# Altium PCB WIFISocket.PcbDoc
Units mm, origin at the board's own origin, x right, y up, seen from the top; angles counter-clockwise.
Board outline 40 x 64 mm, 2 copper layers (Top Layer, Bottom Layer); 30 components, 23 nets, 92 pads, 80 vias.
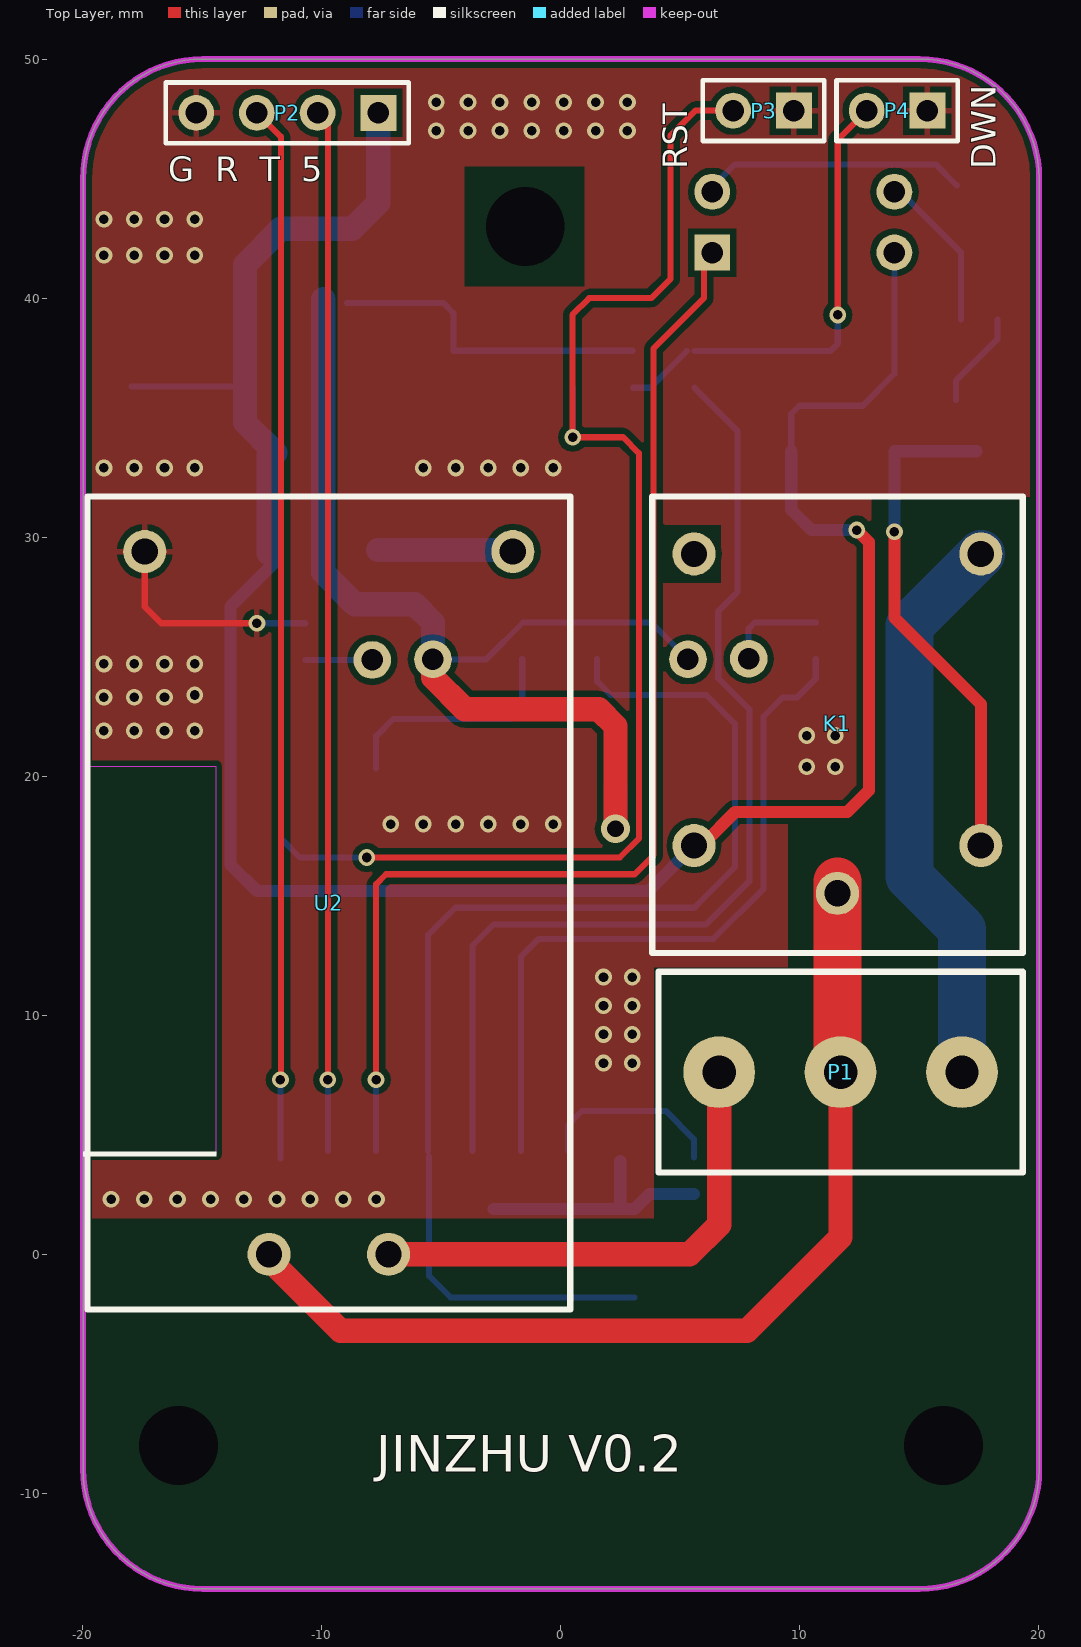
[diagram p0: Top Layer view]
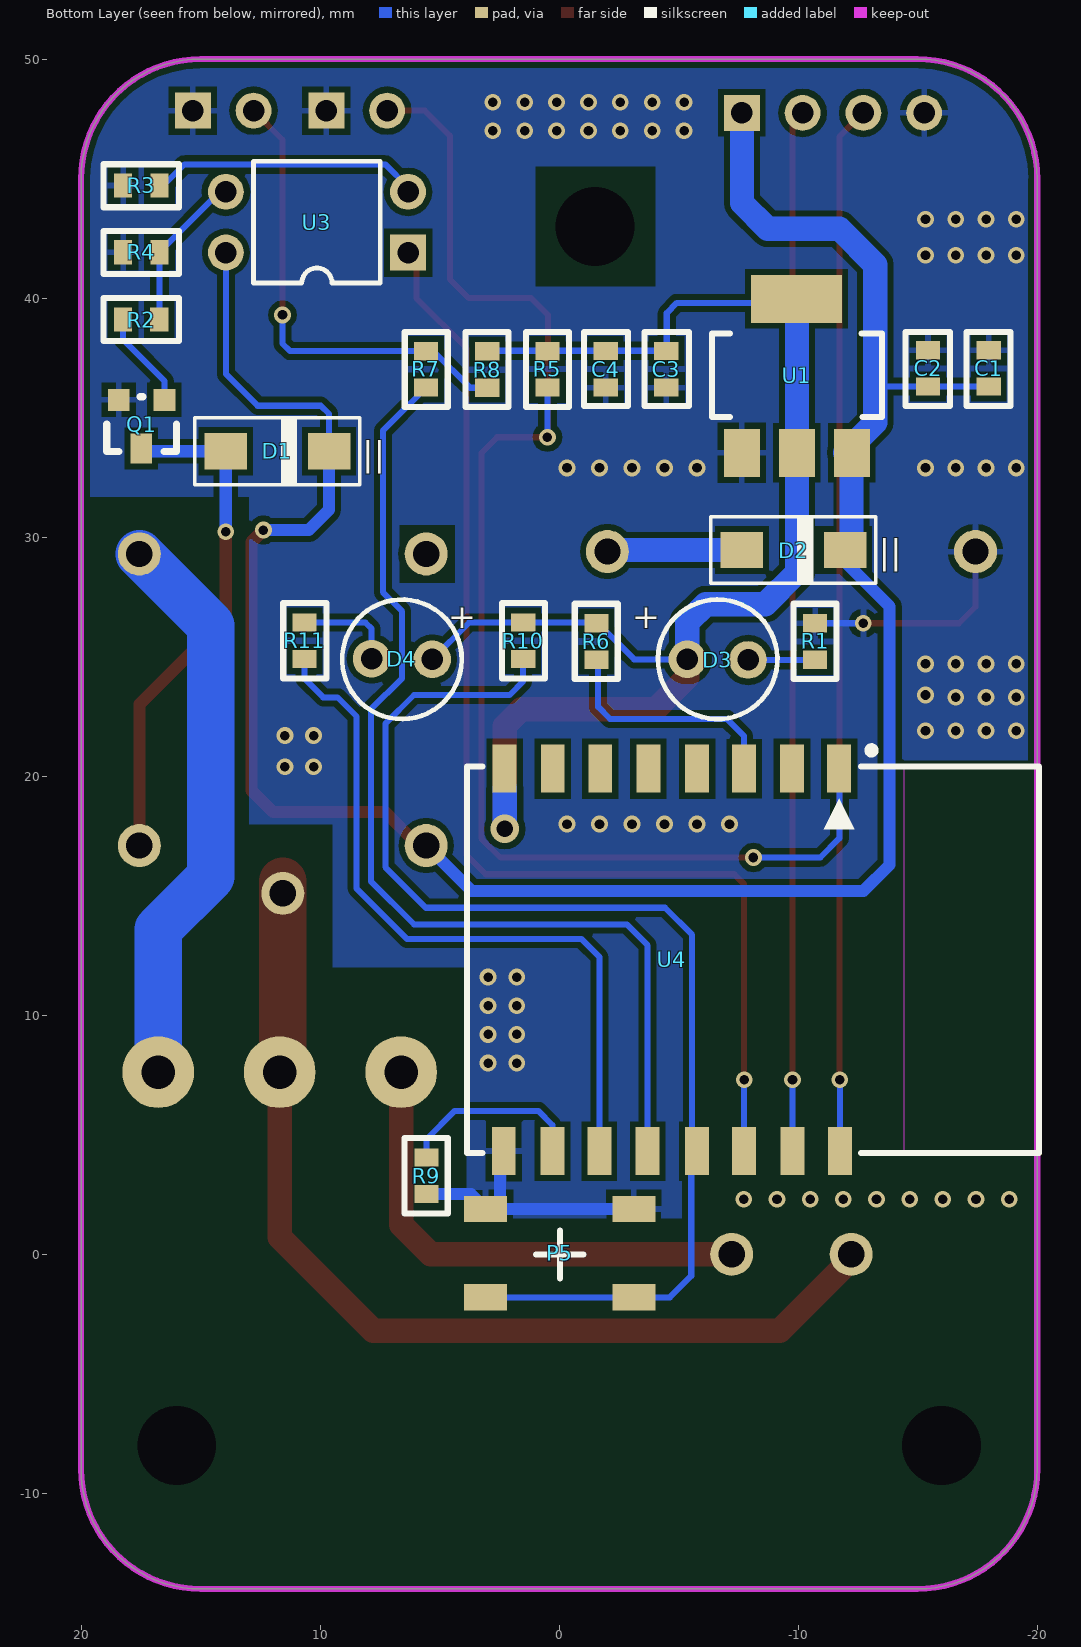
[diagram p1: Bottom Layer view, seen from below]

## Layer stack, top to bottom
Top Layer: signal copper 0.0356
Dielectric: dielectric 0.32, FR-4, Dk 4.8
Bottom Layer: signal copper 0.0356

## Board outline
-19.973,-8.998 -19.973,45.002 cw(c-14.973,45.002) -14.973,50.002 15.027,50.002 cw(c15.027,45.002) 20.027,45.002 20.027,-8.998 cw(c15.027,-8.998) 15.027,-13.998 -14.973,-13.998 cw(c-14.973,-8.998)

## Design rules (kind name [scope] priority, off if disabled: settings)
Clearance [All] p1: gap=0.254
HoleSize [All] p1: absolutevalues=TRUE maxlimit=5 minlimit=0.025 maxpercent=80.000 minpercent=20.000
PolygonConnect [All] p1: connectstyle=Relief reliefconductorwidth=0.254 reliefentries=4 polygonreliefangle="90 Angle"
RoutingVias [All] p1: holewidth=0.711 width=1.27 viastyle="Through Hole" minholewidth=0.711 minwidth=1.27 maxholewidth=0.711 maxwidth=1.27
SilkscreenOverComponentPads [All] p1: minsilkscreentomaskgap=0.254
SolderMaskExpansion [All] p1: expansion=0.102
TestPointUsage [All] p1: valid=0 allowmultiple=FALSE
Testpoint [All] p1: side=15 testpointundercomponent=TRUE minsize=1.016 maxsize=2.54 preferedsize=1.524 minholesize=0 maxholesize=1.016 preferedholesize=0.813 testpointgrid=0.025 style=1023 order=0123456789
Width 220VWidth [(InNet('ACL') OR InNet('ACN') OR InNet('SWL'))] p1: maxlimit=3 minlimit=1 preferedwidth=2
Width VCCWidth [(InNet('+5V') AND InNet('GND') AND InNet('VCC_3.3V'))] p2: maxlimit=1.016 minlimit=0.254 preferedwidth=0.508
Width [All] p3: maxlimit=2 minlimit=0.254 preferedwidth=0.254
22 further rules are at their usual default settings.

## Components (designator, comment, footprint, x,y, rotation, side; value= is the part's Value field where it differs from the comment)
C1 "0.1uF" 0603A -17.956,36.292 r90 bottom
C2 "10uF" 0603A -15.416,36.292 r90 bottom
C3 "10uF" 0603A -4.448,37.792 r270 bottom
C4 "0.1uF" 0603A -1.908,37.792 r270 bottom
D1 "IN4007" 1N4007 13.972,33.596 r180 bottom
D2 "IN4007" 1N4007 -7.62,29.464 r180 bottom
D3 "LED" LED -6.604,24.892 r0 bottom
D4 "LED" LED 6.604,24.892 r180 bottom
K1 "Relay" Relay 5.588,29.3 r180 top
P1 "Connector" KF128-3P 6.638,7.62 r0 top
P2 "UART" HDR1X4 -7.62,47.752 r180 top
P3 "RESET" HDR1X2 9.764,47.844 r180 top
P4 "DOWN" HDR1X2 15.352,47.844 r180 top
P5 "Button" BUTTON 0,0 r0 bottom
Q1 "S0805" SOT23 17.496,34.728 r0 bottom
R1 "Res" 0603R -10.668,26.416 r270 bottom
R2 "Res" 0603R 16.738,39.116 r0 bottom
R3 "Res" 0603R 18.288,44.704 r180 bottom
R4 "Res" 0603R 18.288,41.91 r180 bottom
R5 "Res" 0603R 0.508,36.242 r90 bottom
R6 "Res" 0603R -1.524,26.416 r270 bottom
R7 "Res" 0603R 5.588,36.242 r90 bottom
R8 "Res" 0603R 3.048,37.792 r270 bottom
R9 "Res" 0603R 5.588,4.064 r270 bottom
R10 "Res" 0603R 1.524,24.892 r90 bottom
R11 "Res" 0603R 10.668,24.892 r90 bottom
U1 "AMS1117-3.3" AMS1117-3.3 -7.62,33.528 r180 bottom
U2 "HLK-PM01" HLK_PM01 -12.192,0 r90 top
U3 "TLP521" DIP-4 10.16,43.18 r90 bottom
U4 "ESP12N" ESP_12 -11.684,20.32 r270 bottom

## Footprints (in the part's own frame and the unit in brackets; to place one, negate y for a bottom-side part, rotate by r counter-clockwise, add the part's x,y. Pads: shape width x height; smd on the part's side, far side on the other; paste and mask are expansions set on the pad)
1N4007 [mil]
  rect 70x60 smd: 1(0,0) 2(170,0)
  silkscreen extent -51,-55 220,55
0603A [mil]
  rect 30x40 smd: 1(0.31,0.44) 2(60.31,0.44)
  silkscreen extent -31,-35 91,37
0603R [mil]
  rect 30x40 smd: 1(0.66,0.41) 2(60.66,0.41)
  silkscreen extent -31,-35 93,35
AMS1117-3.3 [mil]
  rect 59x79 smd: 1(0,0) 2(90.55,0) 3(181.1,0)
  rect 150x79 smd: 2(89.88,253.54)
  silkscreen extent -49,59 231,197
BUTTON [mm] "[CHECK][9/6][PIN]"
  rect 1.8x1.1 smd: 1(-3.1,1.8) 1(3.1,1.8) 2(-3.1,-1.9) 2(3.1,-1.9)
  silkscreen extent -1,-1 1,1
DIP-4 [mm] "DIP; 4 Leads; Row Spacing 7.62 mm; Pitch 2.54 mm"
  rect 1.5x1.5 hole 0.9: 1(-1.27,-3.81)
  round 1.5 hole 0.9: 2(1.27,-3.81) 3(1.27,3.81) 4(-1.27,3.81)
  silkscreen extent -2.55,-2.65 2.55,2.65
ESP_12 [mm]
  rect 2x1 smd: 1(0,0) 2(0,-1.97) 3(0,-3.97) 4(0,-5.94) 5(0,-7.98) 6(0,-9.99) 7(0,-11.98) 8(0,-13.99) 9(16,-14.03) 10(16,-11.99) 11(16,-10.03) 12(16,-8.01) 13(16,-5.95) 14(16,-3.97) 15(16,-1.95) 16(16,0.03)
  silkscreen extent -0.91,-15.57 16.08,8.37
HDR1X2 [mm] "Connector; Header; 2 Position"
  rect 1.5x1.5 hole 0.9: 1(0,0)
  round 1.5 hole 0.9: 2(2.54,0)
  silkscreen extent -1.27,-1.27 3.81,1.27
HDR1X4 [mm] "Connector; Header; 4 Position"
  rect 1.5x1.5 hole 0.9: 1(0,0)
  round 1.5 hole 0.9: 2(2.54,0) 3(5.08,0) 4(7.62,0)
  silkscreen extent -1.27,-1.27 8.89,1.27
HLK_PM01 [mm] "[CHECK][9/5][SIZE][PIN]"
  round 1.8 hole 1.1: 1(0,0) 2(0,-5) 3(29.4,5.2) 4(29.4,-10.2)
  silkscreen extent -2.3,-12.6 31.7,7.6
KF128-3P [mm] "5.08mm"
  round 3 hole 1.4: 1(0,0) 2(5.08,0) 3(10.16,0)
  silkscreen extent -2.54,-4.2 12.7,4.2
LED [mil]
  round 62 hole 35.43: A(50,0) K(-50,1)
  silkscreen extent -98,-98 98,98
Relay [mm]
  round 1.8 hole 1.1: 1(-6,14.2) 2(0,0) 3(-12,0) 4(0,12.2) 5(-12,12.2)
  silkscreen extent -13.75,-2.4 1.75,16.7
SOT23 [mil]
  rect 36x36 smd: B(-37.5,-40) E(37.5,-40)
  rect 36x50 smd: C(0.5,40)
  silkscreen extent -57,-45 58,45

## Part data
C1 C4: library part CAP, "Capacitor"
C2 C3: library part CAPACITOR, "Capacitor"
D1 D2: "整流二极管"
K1: "SPDT Relay"
P1: library part Socket, "220V插座焊盘"
P2: "UART下载接口"
P3 P4: library part "Header 2", "Header, 2-Pin"
P5: "按键"
Q1: "NPN"
R1 R2 R3 R4 R5 R6 R7 R8 R9 R10 R11: "Resistor"
U1: "5Vת3V"
U2: "220V AC转5V DC模块"
U3: library part Optoisolator, "光耦"
U4: "ESP12N无线模块"

## Free pads (board coordinates)
  round 0 hole 3.3: 0(-1.473,43.002) 1(-15.973,-7.998) 2(16.027,-7.998)

## Via types
v1: diameter 0.7, hole 0.4, Top Layer to Bottom Layer, 79 vias
v2: diameter 1.2, hole 0.7, Top Layer to Bottom Layer, 1 vias

## Nets (pads, with @x,y where several pads share a name; then routed paths per layer and width w, separated by ;. In a path a pad name is that pad's centre, name@x,y a point inside that pad or via, vN(x,y) a via of type N, cw(c..) or ccw(c..) an arc to the next point about the centre after c; other vN are vias at no path point)
+5V: C1.1 C2.1 D1.2 D2.2 K1.4 P2.1 U1.3 U3.4 | length 97.8
  Top Layer w0.508: K1.4@6,17.2 7.3,18.5 12,18.5 12.9,19.4 12.9,29.8 v1(12.4,30.3)
  Bottom Layer w0.254: C1.1 C2.1 -13.2,36.3 ; D1.2 9.654,35.154 10,35.5 12.64,35.5 13.97,36.83 U3.4
  Bottom Layer w0.508: D2.2@-11.938,28.962 -13.8,27.1 -13.8,16.3 -12.7,15.2 3.688,15.2 K1.4 ; D1.2 9.654,31.146 10.5,30.3 v1(12.4,30.3)
  Bottom Layer w1.016: D2.2@-12.2,29.326 U1.3@-12.2,33.4 ; U1.3@-11.938,33.538 -13.2,34.8 -13.2,41.4 -11.7,42.9 -8.7,42.9 -7.62,43.98 P2.1
ACL: K1.1 P1.2 U2.1 | length 41.4
  Top Layer w1.016: U2.1 -12.192,-0.208 -9.2,-3.2 7.8,-3.2 11.718,0.718 P1.2
  Top Layer w2: P1.2@11.588,8.128 K1.1@11.588,15.6
ACN: P1.1 U2.2 | length 20.7
  Top Layer w1.016: U2.2 5.4,0 6.638,1.238 P1.1
GND: C1.2 C2.2 C3.2 C4.2 P2.4 P3.1 P4.1 P5.2 Q1.E R1.1 R3.1 R4.1 R9.2 U1.1 U2.3 U4.9 | length 19.8
  Top Layer w0.254: U2.3 -17.392,27.092 -16.7,26.4 v1(-12.7,26.4)
  Bottom Layer w0.254: v1(-12.7,26.4) R1.1
  Bottom Layer w0.508: P5.2@-2.8,1.9 3.1,1.9 3.723,2.523 R9.2 ; P5.2@2.5,2 U4.9@2.5,3.9
  other v1: -18.8,2.3 -17.412,2.3 -16.025,2.3 -14.637,2.3 -13.25,2.3 -11.862,2.3 -10.475,2.3 -9.087,2.3 -7.7,2.3 1.8,8 3,8 1.8,9.2 3,9.2 1.8,10.4 3,10.4 1.8,11.6 3,11.6 -7.1,18 -5.74,18 -4.38,18 -3.02,18 -1.66,18 -0.3,18 10.3,20.4 11.5,20.4 10.3,21.7 11.5,21.7 -19.1,21.9 -17.833,21.9 -16.567,21.9 -15.3,21.9 -19.1,23.3 -17.833,23.3 -16.567,23.3 -15.3,23.4 -19.1,24.7 -17.833,24.7 -16.567,24.7 -15.3,24.7 -19.1,32.9 -17.833,32.9 -16.567,32.9 -15.3,32.9 -5.74,32.9 -4.38,32.9 -3.02,32.9 -1.66,32.9 -0.3,32.9 -19.1,41.8 -17.833,41.8 -16.567,41.8 -15.3,41.8 -19.1,43.3 -17.833,43.3 -16.567,43.3 -15.3,43.3 -5.2,47 -3.867,47 -2.533,47 -1.2,47 0.133,47 1.467,47 2.8,47 -5.2,48.2 -3.867,48.2 -2.533,48.2 -1.2,48.2 0.133,48.2 1.467,48.2 2.8,48.2
NetD1_1: D1.1 K1.5 Q1.C | length 21.4
  Top Layer w0.508: v1(13.972,30.228) 13.972,26.628 17.588,23.012 K1.5
  Bottom Layer w0.508: v1(13.972,30.228) D1.1 Q1.C@17.393,33.596
NetD2_1: D2.1 U2.4 | length 5.9
  Bottom Layer w1.016: D2.1 U2.4@-1.764,29.464
NetD3_2: D3.K R1.2 | length 2.8
  Bottom Layer w0.254: R1.2@-10.67,24.867 D3.K
NetD4_2: D4.K R11.2 | length 4.2
  Bottom Layer w0.254: D4.K 7.874,26.174 8.133,26.433 R11.2
NetP2_2: P2.2 U4.15 | length 44.1
  Top Layer w0.254: P2.2@-9.801,47.394 P2.2 -9.734,47.326 v1@-9.734,7.4
  Bottom Layer w0.254: U4.15 v1@-9.734,7.4
  other v1: -9.734,7.3
NetP2_3: P2.3 U4.16 | length 44.2
  Top Layer w0.254: P2.3 -11.7,46.752 v1@-11.7,7.3
  Bottom Layer w0.254: U4.16@-11.714,4.015 U4.16 v1@-11.714,7.314
  other v1: -11.714,7.3
NetP3_2: P3.2 R5.1 U4.1 | length 58.2
  Top Layer w0.254: v1(-8.1,16.6) 2.487,16.6 3.281,17.394 3.281,33.519 2.618,34.182 v1(0.518,34.182) ; v1@0.5,34.182 0.5,39.3 1.2,40 3.8,40 4.6,40.8 4.6,46.8 5.644,47.844 P3.2
  Bottom Layer w0.254: U4.1@-11.7,19.8 -11.7,17.4 -10.9,16.6 v1(-8.1,16.6) ; v1(0.518,34.182) R5.1
NetP4_2: P4.2 R7.2 R8.2 | length 19.3
  Top Layer w0.254: v1(11.6,39.3) 11.6,46.632 P4.2
  Bottom Layer w0.254: R8.2 3.751,36.251 R7.2@5.283,37.783 ; R7.2 11.283,37.783 11.6,38.1 v1(11.6,39.3)
NetQ1_B: Q1.B R2.2 | length 4.1
  Bottom Layer w0.254: Q1.B 16.543,36.543 18.279,38.279 R2.2
NetR2_1: R2.1 R4.2 U3.3 | length 6.4
  Bottom Layer w0.254: U3.3@14.218,44.45 16.755,41.913 R2.1
NetR3_2: R3.2 U3.2 | length 11.2
  Bottom Layer w0.254: U3.2 6.35,44.65 7.3,45.6 15.7,45.6 R3.2@16.586,44.714
NetR6_2: R6.2 U4.3 | length 10
  Bottom Layer w0.254: U4.3 -7.714,21.672 -6.986,22.4 -2.1,22.4 -1.6,22.9 R6.2@-1.6,24.9
NetR7_1: R7.1 U4.12 | length 43.6
  Bottom Layer w0.254: U4.12 -3.674,12.926 -2.8,13.8 6.1,13.8 7.9,15.6 7.9,22.8 6.6,24.1 6.6,26.9 7.4,27.7 7.4,34.457 R7.1
NetR9_1: R9.1 U4.10 | length 7.9
  Bottom Layer w0.254: U4.10 0.306,5.406 0.9,6 4.4,6 5.578,4.822 R9.1
SW_BUTTON: P5.1 R10.1 U4.13 | length 50.5
  Bottom Layer w0.254: U4.13@-5.534,4.32 -5.534,13.366 -4.4,14.5 5.6,14.5 7.3,16.2 7.3,22.2 6.1,23.4 2.1,23.4 1.534,23.966 R10.1 ; U4.13@-5.5,4.1 -5.5,-0.9 -4.6,-1.8 -3.1,-1.8 P5.1@3.1,-1.8
SW_CNT: U3.1 U4.14 | length 49.7
  Top Layer w0.254: v1(-7.714,7.3) -7.714,15.486 -7.3,15.9 3.1,15.9 3.9,16.7 3.9,37.9 6.003,40.003 U3.1@6.003,42.3
  Bottom Layer w0.254: U4.14 v1@-7.714,7.214
SW_LED: R11.1 U4.11 | length 30.3
  Bottom Layer w0.254: U4.11 -1.654,12.446 -0.9,13.2 6.4,13.2 8.5,15.3 8.5,22.5 9.3,23.3 9.9,23.3 10.678,24.078 R11.1
SWL: K1.3 P1.3 | length 23.8
  Bottom Layer w2: P1.3 16.798,13.602 14.6,15.8 14.6,26.312 K1.3
VCC_3.3V: C3.1 C4.1 D3.A D4.A R5.2 R6.1 R8.1 R10.2 U1.2 U4.8 | length 59.3
  Top Layer w1.016: D3.A -5.334,24.134 -4,22.8 1.6,22.8 2.3,22.1 v2(2.3,17.8)
  Bottom Layer w0.254: U1.2@-8.932,39.8 -4.9,39.8 -4.475,39.375 -4.475,37.8 -1.935,37.8 0.501,37.8 R8.1@3.013,37.8 ; D3.A -3.108,24.892 -1.567,26.433 R10.2 3.793,26.433 D4.A
  Bottom Layer w1.016: U1.2@-9.92,39.951 -9.92,33.528 -9.92,28.52 -8.6,27.2 -6.1,27.2 -5.334,26.434 D3.A ; v2(2.3,17.8) U4.8@2.3,19.5
pads on no net: K1.2 U4.2 U4.4 U4.5 U4.6 U4.7

## Polygon pours and split planes (outlines as drawn)
GND on Top Layer "Top Layer-No Net" (solid, remove dead copper, pour order 1000): -20,-14 19.95,-14 19.951,-13.999 20.001,-13.999 20.002,-13.998 20,-13.996 20,50 -20,50
GND on Bottom Layer "Top Layer-No Net" (solid, remove dead copper, pour order 1001): -19.959,-14.028 19.991,-14.028 19.992,-14.027 20.042,-14.027 20.043,-14.025 20.041,-14.023 20.041,49.972 -19.959,49.972

## Keep-outs
Bottom Layer:
  rectangle: -19.973,4.2 -14.5,4.3
Top Overlay:
  rectangle: -19.973,4.1 -14.4,4.3
Keep-Out Layer:
  the board outline again, w0.254
Multi-Layer:
  rectangle: -19.973,4.2 -14.4,20.4

## Other copper
Multi-Layer:
  pour cut-out: -4,45.5 1,45.5 1,40.5 -4,40.5
  pour cut-out: 6.7,30.5 6.7,28.1 4.4,28.1 4.4,30.5
  pour cut-out: -19.973,-4.5 -11.5,-4.5 -11.5,-13.998 -11.602,-14 -20,-14
  pour cut-out: 11.529,-4.5 20.002,-4.5 20.002,-13.998 19.9,-14 11.502,-14
  pour cut-out: 3.9,12 20.027,12 20.027,1.5 3.9,1.5
  pour cut-out: 20.027,1.5 20.002,-4.5 -19.973,-4.5 -19.973,1.5
  pour cut-out: 9.5,18 13.5,18 13.5,12 9.5,12
  pour cut-out: 13,31.7 20.027,31.7 20.027,12 13,12

## Silkscreen, mask and mechanical layers (free items; w line width, h text height)
Top Overlay:
  text "RST" at 5.3,45.4 h1.02 r90
  text "DWN" at 18.2,45.4 h1.02 r90
  text "G  R  T  5" at -16.4,44.9 h1.02
  text "JINZHU V0.2" at -7.7,-9.1 h1.52
Bottom Overlay:
  text "||" at 7.3,33 h1.02
  text "||" at -14.3,28.9 h1.02
  text "+" at -4.2,26.2 h1.02
  text "+" at 3.5,26.2 h1.02
Top Solder:
  lines w2: 11.588,15.6 11.588,7.75 11.718,7.62
Bottom Solder:
  lines w2: 16.798,7.62 16.798,13.602 14.6,15.8 14.6,26.312 17.588,29.3

## Text inside footprints (layer, text, board x,y; h text height)
U4: Mechanical 13 "CUTOUT POLYGON" at -19.05,20.193 h0.25 r90; Mechanical 13 "ANTENNA AREA" at -19.558,20.193 h0.25 r90